# EAGLE board intelligent half bridge R2 demo board (EAGLE 5.10)
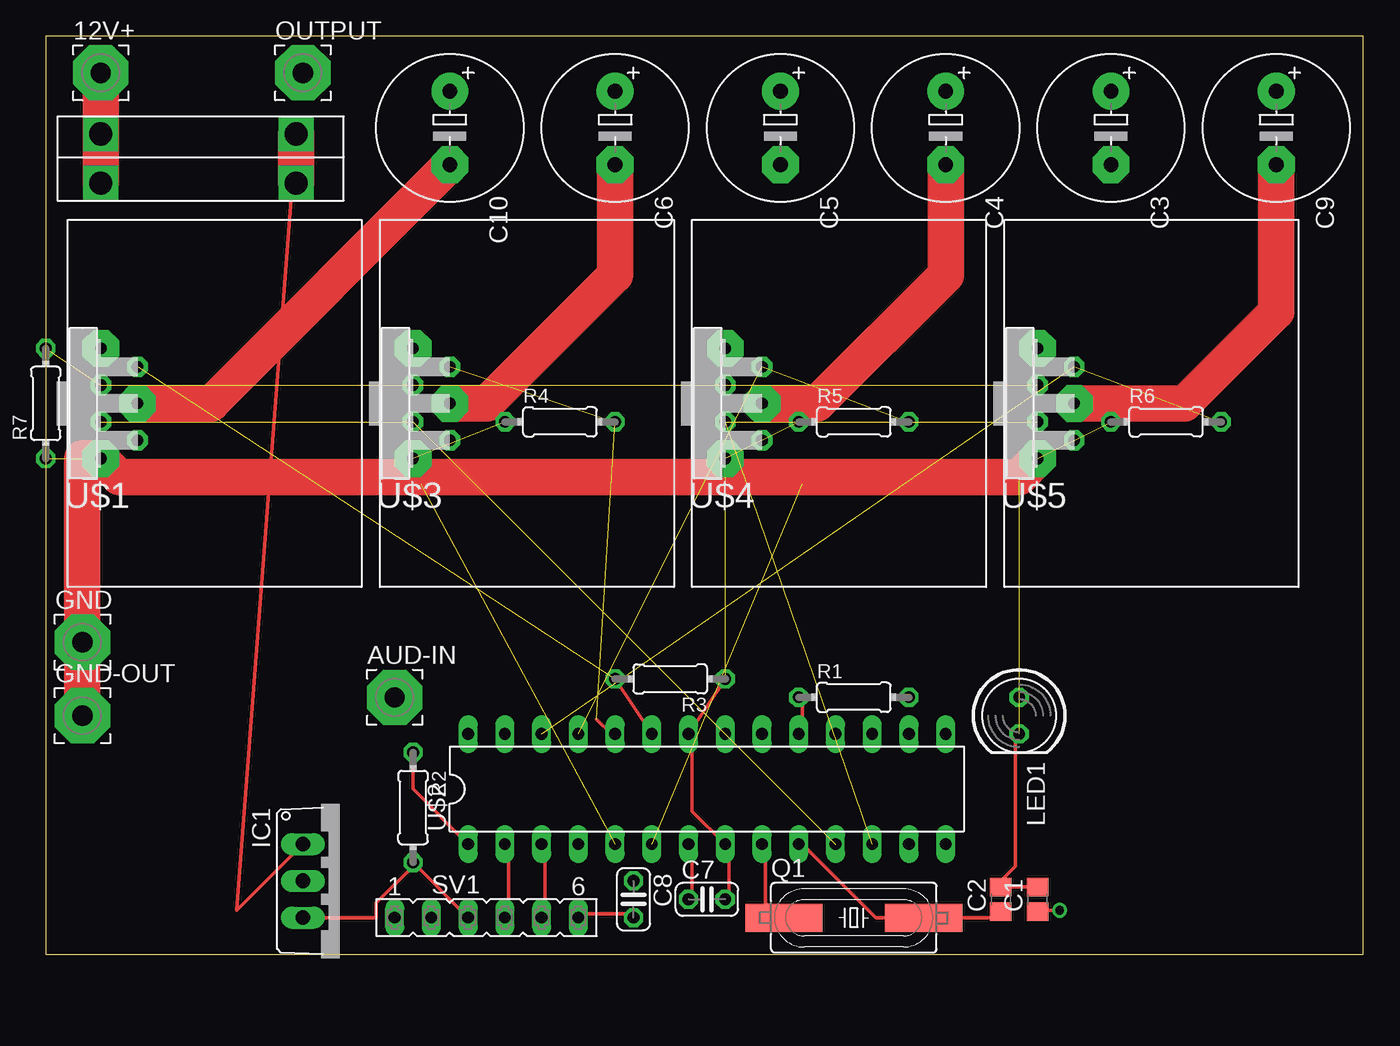
[diagram p0: board, top side]
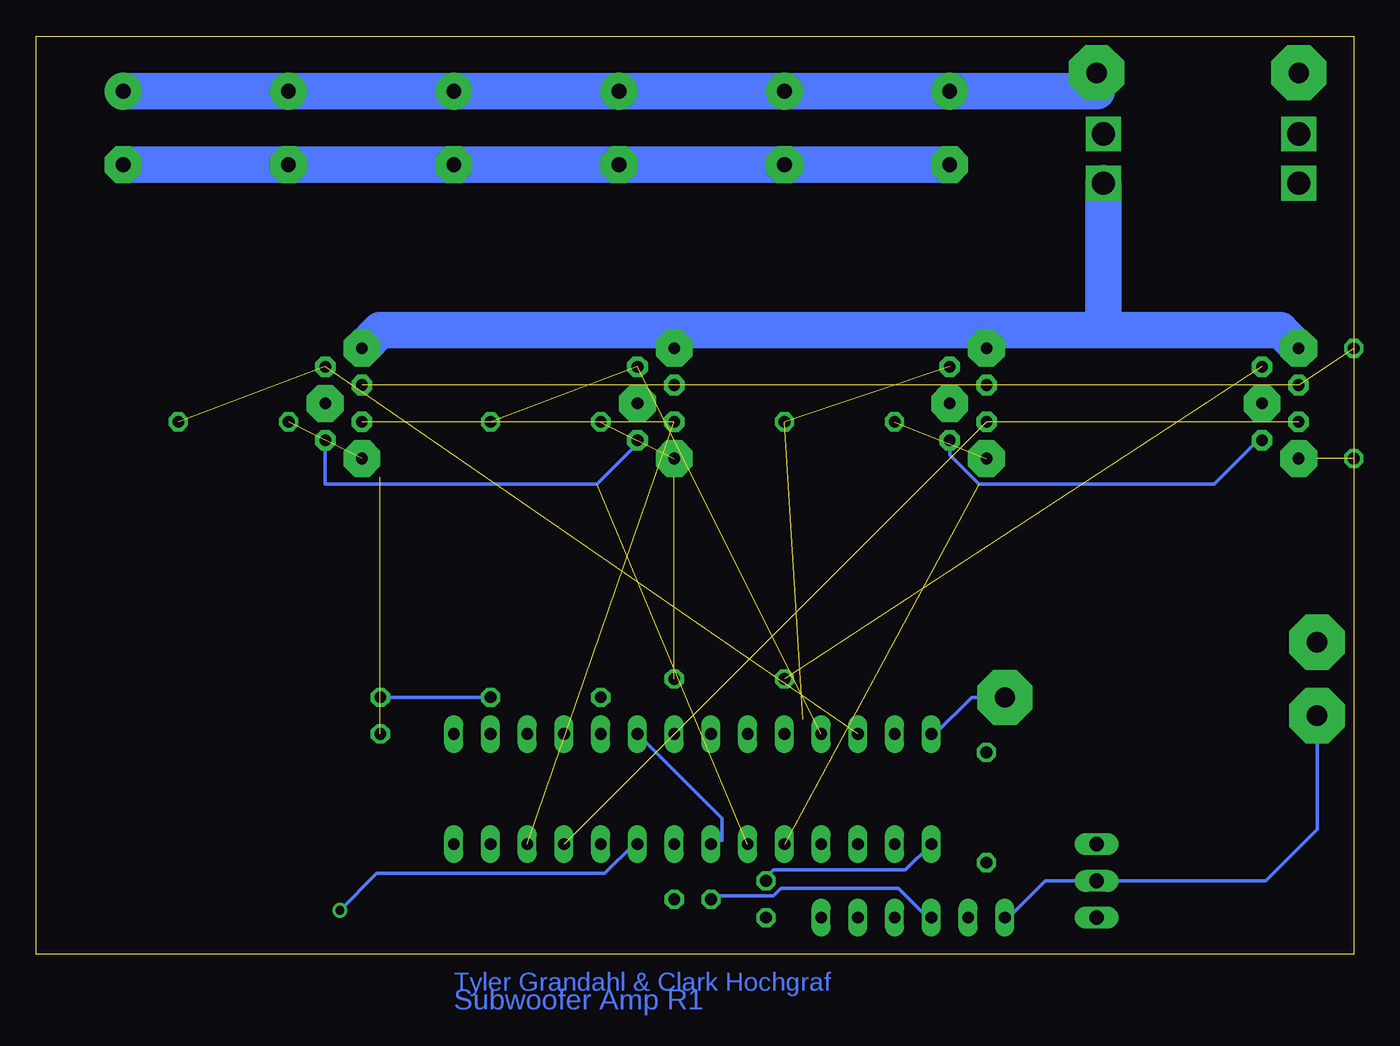
[diagram p1: board, bottom side, seen from below]

Size 91.11 x 63.49 mm. Coordinates in mm from the lower left corner, seen from the top.
Outline: 0,0 91.11,0 91.11,63.49 0,63.49 0,0
Copper layers (1*16): Top 0.035mm / dielectric 1.5mm / Bottom 0.035mm
Design rules "default": minimum track width 10mil, minimum drill 24mil, track to track 8mil, track to pad 8mil, pad to pad 8mil, via to via 8mil, smd to smd 8mil, copper to edge 40mil, drill to drill 8mil, minimum pad ring 10mil, minimum via ring 8mil, stop-mask expansion 4mil, vias tented up to drill 0mil, thermal gap 10mil

## Footprints (pad centres in the part's own frame; a part is rotated, then mirrored left to right if it is on the bottom)
3,81/1,4 = drill 1.397 pad 3.81 octagon: 1 0,0
C0805 = smd 1.3 x 1.5: 1 -0.85,0; 2 0.85,0
E5-10,5 = drill 1.016 pad 2.54 round: + -2.54,0 | drill 1.016 pad 2.54 octagon: - 2.54,0
C025-024X044 = drill 0.813 octagon: 1 -1.27,0; 2 1.27,0
2IN1_FUSEHOLDER = drill 1.6 square: 1 0,0; 2 0,3.4; 3 13.5,3.4; 4 13.5,0
TO220V = drill 1.016 long: 1 -2.54,-2.54; 2 0,-2.54; 3 2.54,-2.54
LED5MM = drill 0.813 octagon: A -1.27,0; K 1.27,0
HC49UP = smd 5.334 x 1.93: 1 -4.826,0; 2 4.826,0
0204/7 = drill 0.813 octagon: 1 -3.81,0; 2 3.81,0
FE06 = drill 0.813 long: 1 -6.35,0; 2 -3.81,0; 3 -1.27,0; 4 1.27,0; 5 3.81,0; 6 6.35,0
TO220-7-V-HS = drill 0.8 pad 2.54 octagon: 1 -3.81,0; 4 0,-2.54; 7 3.81,0 | drill 0.8 pad 1.422 octagon: 2 -2.54,-2.54; 3 -1.27,0; 5 1.27,0; 6 2.54,-2.54
DIL28-3 = drill 0.813 long: 1 -16.51,-3.81; 2 -13.97,-3.81; 3 -11.43,-3.81; 4 -8.89,-3.81; 5 -6.35,-3.81; 6 -3.81,-3.81; 7 -1.27,-3.81; 8 1.27,-3.81; 9 3.81,-3.81; 10 6.35,-3.81; 11 8.89,-3.81; 12 11.43,-3.81; 13 13.97,-3.81; 14 16.51,-3.81; 15 16.51,3.81; 16 13.97,3.81; 17 11.43,3.81; 18 8.89,3.81; 19 6.35,3.81; 20 3.81,3.81; 21 1.27,3.81; 22 -1.27,3.81; 23 -3.81,3.81; 24 -6.35,3.81; 25 -8.89,3.81; 26 -11.43,3.81; 27 -13.97,3.81; 28 -16.51,3.81

## Placement (x,y rotation side)
12V+  [3,81/1,4]  3.81,60.96 0 top
AUD-IN  [3,81/1,4]  24.13,17.78 0 top
C1  22pF  [C0805]  68.58,3.81 90 top
C2  22pF  [C0805]  66.04,3.81 90 top
C3  [E5-10,5]  73.66,57.15 270 top
C4  [E5-10,5]  62.23,57.15 270 top
C5  [E5-10,5]  50.8,57.15 270 top
C6  [E5-10,5]  39.37,57.15 270 top
C7  0.1uF  [C025-024X044]  45.72,3.81 0 top
C8  0.1uF  [C025-024X044]  40.64,3.81 270 top
C9  [E5-10,5]  85.09,57.15 270 top
C10  [E5-10,5]  27.94,57.15 270 top
FUSE  2IN1FUSEHOLDER  [2IN1_FUSEHOLDER]  3.81,53.34 0 top
GND  [3,81/1,4]  2.54,21.59 0 top
GND-OUT  [3,81/1,4]  2.54,16.51 0 top
IC1  7805TV  [TO220V]  20.32,5.08 270 top
LED1  [LED5MM]  67.31,16.51 270 top
OUTPUT  [3,81/1,4]  17.78,60.96 0 top
Q1  [HC49UP]  55.88,2.54 0 top
R1  470  [0204/7]  55.88,17.78 0 top
R2  10K  [0204/7]  25.4,10.16 270 top
R3  470  [0204/7]  43.18,19.05 180 top
R4  470  [0204/7]  35.56,36.83 0 top
R5  470  [0204/7]  55.88,36.83 0 top
R6  470  [0204/7]  77.47,36.83 0 top
R7  RS  [0204/7]  0,38.1 90 top
SV1  [FE06]  30.48,2.54 0 top
U$1  BTN7930SV-HS  [TO220-7-V-HS]  3.81,38.1 90 top
U$2  ARDUINO-MEGA328P  [DIL28-3]  45.72,11.43 0 top
U$3  BTN7930SV-HS  [TO220-7-V-HS]  25.4,38.1 90 top
U$4  BTN7930SV-HS  [TO220-7-V-HS]  46.99,38.1 90 top
U$5  BTN7930SV-HS  [TO220-7-V-HS]  68.58,38.1 90 top

## Library data of the parts
12V+ AUD-IN GND GND-OUT OUTPUT = wirepad
C1 C2 = resistor
C3-C10 R1-R7 = rcl
FUSE U$1-U$5 = custom
IC1 = linear
LED1 = led
Q1 = crystal
SV1 = con-lsta

## Nets
+5V: C7.1 IC1.3 R2.2 SV1.3 U$2.7 U$2.20
+12V: FUSE.3 FUSE.4 IC1.1 U$1.7 U$3.7 U$4.7 U$5.7
GND: C1.2 C2.2 C7.2 GND-OUT.1 GND.1 IC1.2 LED1.K R3.1 R4.1 R5.1 R6.1 R7.1 SV1.1 U$1.1 U$2.8 U$2.22 U$3.1 U$4.1 U$5.1
N$1: R3.2 U$1.6 U$2.23
N$2: 12V+.1 FUSE.1 FUSE.2
N$3: C8.2 SV1.6
N$4: C8.1 R2.1 U$2.1
N$6: C2.1 Q1.2 U$2.10
N$7: C1.1 Q1.1 U$2.9
N$8: U$1.3 U$2.11 U$3.3
N$9: R1.1 U$2.19
N$10: LED1.A R1.2
N$11: C3.- C4.- C5.- C6.- C9.- C10.- U$1.4 U$3.4 U$4.4 U$5.4
N$12: C3.+ C4.+ C5.+ C6.+ C9.+ C10.+ OUTPUT.1
N$13: U$1.2 U$2.5 U$3.2
N$14: SV1.4 U$2.2
N$15: SV1.5 U$2.3
N$16: R4.2 U$2.24 U$3.6
N$17: U$2.6 U$4.2 U$5.2
N$18: U$2.12 U$4.3 U$5.3
N$19: R5.2 U$2.25 U$4.6
N$20: R6.2 U$2.26 U$5.6
N$21: R7.2 U$1.5 U$3.5 U$4.5 U$5.5
N$23: AUD-IN.1 U$2.28

## Tracks (layer width: path | path; a pad name or v marks a point on that pad's centre or on a via)
+5V
  Top 0.254: SV1.3 R2.2 25.4,6.1 22.86,3.56 22.86,2.54 IC1.3 | C7.1 44.7,3.81 44.7,7.37 U$2.7
  Bottom 0.254: U$2.20 43.69,9.4 43.69,7.87 44.2,7.87 U$2.7 | SV1.3 29.46,2.54 31.5,4.57 39.62,4.57 40.13,4.06 44.2,4.06 C7.1
+12V
  Top 0.254: IC1.1 13.21,3.05 FUSE.3
  Top 2.54: FUSE.3 FUSE.4
  Bottom 2.54: U$1.7 5.08,43.18 17.31,43.18 | 25.4,43.18 17.78,43.18 17.31,43.18 | 25.4,43.18 46.99,43.18 | 46.99,43.18 67.31,43.18 U$5.7 | 46.99,43.18 U$4.7 | 25.4,43.18 U$3.7 | FUSE.4 17.31,43.18
GND  (6 unrouted)
  Top 0.254: C1.2 C2.2 66.04,5.08 67.06,6.1 67.06,15.24 LED1.K | R3.1 U$2.22 44.7,14.99 44.7,9.91 U$2.8 47.24,7.37 47.24,3.81 C7.2
  Top 2.54: GND-OUT.1 GND.1 2.54,34.29 U$1.1 5.08,33.02 25.4,33.02 | 25.4,33.02 46.99,33.02 | 46.99,33.02 67.31,33.02 U$5.1 | 25.4,33.02 U$3.1 | 46.99,33.02 U$4.1
  Bottom 0.254: SV1.1 23.88,2.54 21.34,5.08 IC1.2 6.1,5.08 2.54,8.64 GND-OUT.1
N$1  (1 unrouted)
  Top 0.254: R3.2 U$2.23
N$2
  Top 2.54: 12V+.1 FUSE.1 FUSE.2
N$3
  Top 0.254: SV1.6 37.08,2.79 40.64,2.79 C8.2
N$4
  Top 0.254: R2.1 25.4,11.43 U$2.1
  Bottom 0.254: C8.1 40.64,5.33 40.13,5.84 30.99,5.84 U$2.1
N$6
  Top 0.254: C2.1 66.04,2.54 Q1.2 57.4,2.54 52.32,7.62 U$2.10
N$7  (via drill 0.61)
  Top 0.254: v70.1,3.05 68.58,3.05 C1.1 | Q1.1 50.8,2.54 49.78,3.56 49.78,7.62 U$2.9
  Bottom 0.254: v70.1,3.05 67.56,5.59 51.82,5.59 49.78,7.62 U$2.9
N$8  (2 unrouted)
N$9
  Top 0.254: U$2.19 52.32,15.49 52.32,17.53 R1.1
N$10
  Bottom 0.254: R1.2 LED1.A
N$11
  Top 2.54: U$1.4 11.43,38.1 C10.- | U$3.4 30.48,38.1 39.37,46.99 C6.- | U$4.4 53.34,38.1 62.23,46.99 C4.- | U$5.4 78.74,38.1 85.09,44.45 C9.-
  Bottom 2.54: C10.- C6.- C5.- C4.- C3.- C9.-
N$12
  Bottom 2.54: OUTPUT.1 17.78,59.69 C10.+ C6.+ C5.+ C4.+ C3.+ C9.+
N$13  (1 unrouted)
  Bottom 0.254: U$3.2 27.94,34.54 25.91,32.51 9.65,32.51 6.6,35.56 U$1.2
N$14
  Top 0.254: SV1.4 32,2.79 32,7.37 U$2.2
N$15
  Top 0.254: SV1.5 34.54,2.79 34.54,7.37 U$2.3
N$16  (2 unrouted)
  Top 0.254: 38.1,16.26 39.12,15.24 U$2.24
N$17  (1 unrouted)
  Bottom 0.254: U$5.2 71.12,32.51 52.32,32.51 49.28,35.56 U$4.2
N$18  (2 unrouted)
N$19  (2 unrouted)
N$20  (2 unrouted)
N$21  (4 unrouted)
N$23
  Bottom 0.254: U$2.28 28.96,15.24 26.42,17.78 AUD-IN.1

## Text on the board
Bottom: Tyler Grandahl & Clark Hochgraf | Subwoofer Amp R1